# Altium PCB 110-00315-D_B1-DevKit.PcbDoc (part 9 of 9)
Units mil, origin at the board's own origin, x right, y up, seen from the top; angles counter-clockwise.
Board outline 5199.57 x 2702 mil, 8 copper layers (Top Layer, Layer 2-GND-Plane, Layer 3, Layer 4, Layer 5, Layer 6, Layer 7-PWR-Plane, Bottom Layer), stack 60.866 mil thick; 418 components, 298 nets, 1591 pads, 1631 vias.
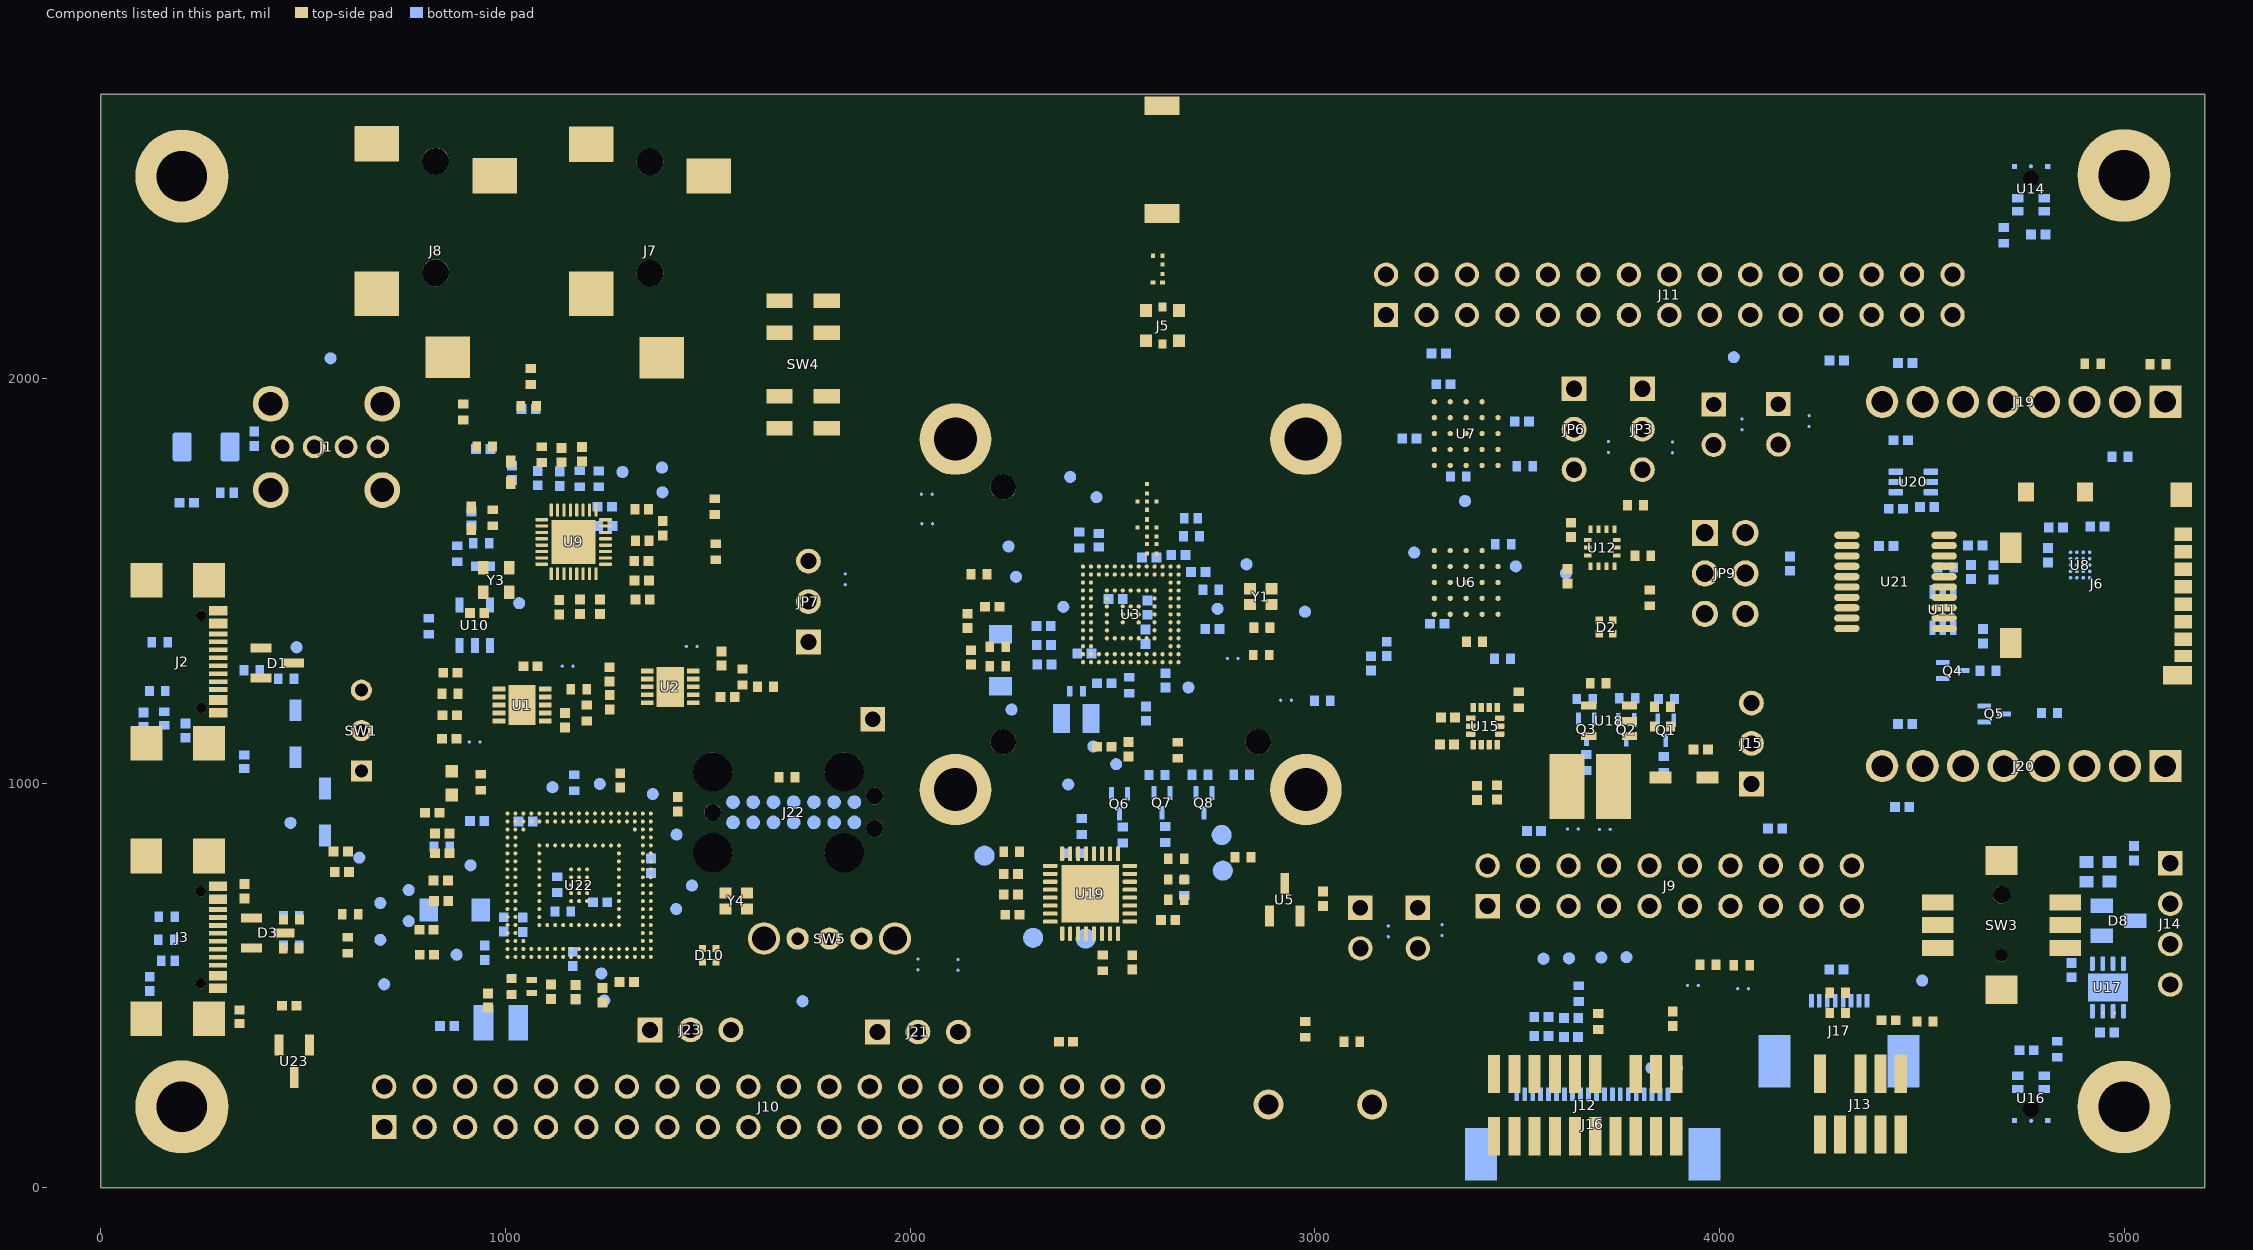
[diagram p14: the components of this part, seen from the top]

## Polygon pours and split planes (outlines as drawn)
GND on Top Layer "GND" (solid, remove dead copper, pour order 15): 19.98,2682.1 1559.5,2682.1 1559.5,2571.6 1559.5,2311.1 4635.5,2311.1 4635.5,2682.1 5199.58,2682.1 5199.58,0 20.99,0
GND on Top Layer "gnd" (solid, remove dead copper, pour order 0): 2640.58,2308.7 2640.58,1589.8 2605.58,1589.8 2605.58,2308.7 2377.58,2308.7 2377.58,1522.8 2817.58,1522.8 2817.58,2308.7
AG on Top Layer "AG" (solid, remove dead copper, pour order 22): 1457.53,1570.8 1238.53,1570.8 1238.53,1680.8 1004.53,1680.8 1004.53,1510.8 858.53,1510.8 858.53,1390.8 778.53,1390.8 778.53,1938.8 607.53,2109.8 607.53,2681.8 1550.53,2675.8 1550.53,1830.8 1457.53,1830.8 1457.53,1820.8
GND on Layer 3 "GND" (solid, remove dead copper, pour order 21): 19.53,2681.8 1558.53,2681.8 1557.53,2680.8 1557.53,2309.8 4635.53,2309.8 4635.53,2681.8 4636.53,2682.8 5179.53,2682.8 5179.53,19.8 20.53,19.8
AG on Layer 3 "AG" (solid, remove dead copper, pour order 10): 1457.53,1570.8 1238.53,1570.8 1238.53,1680.8 1004.53,1680.8 1004.53,1510.8 858.53,1510.8 858.53,1390.8 778.53,1390.8 778.53,1938.8 607.53,2109.8 607.53,2681.8 1550.53,2675.8 1550.53,1830.8 1457.53,1830.8 1457.53,1820.8
GND on Layer 4 "GND" (solid, remove dead copper, pour order 20): 19.53,2681.8 1558.53,2681.8 1557.53,2680.8 1557.53,2309.8 4635.53,2309.8 4635.53,2681.8 4636.53,2682.8 5179.53,2682.8 5179.53,19.8 20.53,19.8
AG on Layer 4 "AG" (solid, remove dead copper, pour order 23): 1457.53,1570.8 1238.53,1570.8 1238.53,1680.8 1004.53,1680.8 1004.53,1510.8 858.53,1510.8 858.53,1390.8 778.53,1390.8 778.53,1938.8 607.53,2109.8 607.53,2681.8 1550.53,2675.8 1550.53,1830.8 1457.53,1830.8 1457.53,1820.8
GND on Layer 6 "GND" (solid, remove dead copper, pour order 18): 19.53,2681.8 1558.53,2681.8 1557.53,2680.8 1557.53,2309.8 4635.53,2309.8 4635.53,2681.8 4636.53,2682.8 5179.53,2682.8 5179.53,19.8 20.53,19.8
AG on Layer 6 "AG" (solid, remove dead copper, pour order 25): 1457.53,1570.8 1238.53,1570.8 1238.53,1680.8 1004.53,1680.8 1004.53,1510.8 858.53,1510.8 858.53,1390.8 778.53,1390.8 778.53,1938.8 607.53,2109.8 607.53,2681.8 1550.53,2675.8 1550.53,1830.8 1457.53,1830.8 1457.53,1820.8
GND on Layer 5 "GND" (solid, remove dead copper, pour order 19): 19.53,2681.8 1558.53,2681.8 1557.53,2680.8 1557.53,2309.8 4635.53,2309.8 4635.53,2681.8 4636.53,2682.8 5179.53,2682.8 5179.53,19.8 20.53,19.8
AG on Layer 5 "AG" (solid, remove dead copper, pour order 24): 1457.53,1570.8 1238.53,1570.8 1238.53,1680.8 1004.53,1680.8 1004.53,1510.8 858.53,1510.8 858.53,1390.8 778.53,1390.8 778.53,1938.8 607.53,2109.8 607.53,2681.8 1550.53,2675.8 1550.53,1830.8 1457.53,1830.8 1457.53,1820.8
GND on Bottom Layer "GND" (solid, remove dead copper, pour order 16): 19.53,2681.8 1558.53,2681.8 1557.53,2680.8 1557.53,2309.8 4635.53,2309.8 4635.53,2681.8 4636.53,2682.8 5179.53,2682.8 5179.53,19.8 20.53,19.8
AG on Bottom Layer "AG" (solid, remove dead copper, pour order 26): 1457.53,1570.8 1238.53,1570.8 1238.53,1680.8 1004.53,1680.8 1004.53,1510.8 858.53,1510.8 858.53,1390.8 778.53,1390.8 778.53,1938.8 607.53,2109.8 607.53,2681.8 1550.53,2675.8 1550.53,1830.8 1457.53,1830.8 1457.53,1820.8
V_3V3 on Layer 7-PWR-Plane (split plane): 5179.48,2080.7 5179.48,380.89 4474.68,380.89 4474.68,503.8 4474.29,505.75 4473.18,507.4 4471.53,508.51 4469.58,508.89 4371,508.89 4369.05,508.51 4367.4,507.4 4366.29,505.75 4365.91,503.8 4365.91,320.89 3659.68,320.89 3659.68,505.8 3659.29,507.75 3658.18,509.4 3656.53,510.51 3654.58,510.89 3577.72,510.89 3575.77,510.51 3574.12,509.4 3573.01,507.75 3572.62,505.8 3572.62,315.89 698.68,315.89 698.68,1125.7 1088.58,1125.7 1090.53,1126.09 1092.18,1127.19 1093.29,1128.85 1093.68,1130.8 1093.68,1330.8 1093.68,1360.7 1303.48,1360.7 1303.48,1010.89 878.8,1010.89 876.85,1010.51 875.19,1009.4 844.97,979.18 843.87,977.53 843.48,975.58 843.48,475.8 843.87,473.85 844.97,472.19 846.63,471.09 848.58,470.7 1048.58,470.7 1050.53,471.09 1052.18,472.19 1095.69,515.7 1288.53,515.7 1290.48,516.09 1292.14,517.19 1293.24,518.85 1293.63,520.8 1293.63,552.7 1323.58,552.7 1325.53,553.09 1327.18,554.19 1328.29,555.85 1328.68,557.8 1328.68,750.7 1374.48,750.7 1374.48,529.8 1374.87,527.85 1375.97,526.19 1377.63,525.09 1379.58,524.7 4854.58,524.7 4856.53,525.09 4858.18,526.19 4859.29,527.85 4859.68,529.8 4859.68,1125.8 4859.68,1650.7 4988.58,1650.7 4990.53,1651.09 4992.18,1652.19 4993.29,1653.85 4993.68,1655.8 4993.68,1845.8 4993.29,1847.75 4992.18,1849.4 4990.53,1850.51 4988.58,1850.89 4311.64,1850.89 4263.14,1899.4 4261.48,1900.51 4259.53,1900.89 4021.69,1900.89 3989.18,1933.4 3987.53,1934.51 3985.58,1934.89 2433.68,1934.89 2433.68,2080.7
V_1V8_R on Layer 7-PWR-Plane (split plane): 276 vertices, not listed, extent 20.1,20.1 5179.48,2681.91
V_1V8_C on Layer 7-PWR-Plane (split plane): 1228.48,1510.89 1083.58,1510.89 1081.63,1510.51 1079.97,1509.4 1078.87,1507.75 1078.48,1505.8 1078.48,1430.89 958.68,1430.89 958.68,1817.7 1228.48,1817.7
VDD_CORE_0V8_J on Layer 7-PWR-Plane (split plane): 1408.48,864.89 1252.53,864.89 1250.58,864.51 1248.93,863.4 1247.82,861.75 1247.43,859.8 1247.43,742.89 1178.68,742.89 1178.68,943.8 1178.29,945.75 1177.18,947.4 1175.53,948.51 1173.58,948.89 986.53,948.89 984.58,948.51 982.93,947.4 981.82,945.75 981.43,943.8 981.43,875.8 981.82,873.85 982.93,872.19 984.58,871.09 986.53,870.7 1088.45,870.7 1089.43,604.78 1089.63,603.81 1089.82,602.85 1089.83,602.84 1089.83,602.83 1090.38,602.02 1090.93,601.19 1090.94,601.19 1090.94,601.18 1091.75,600.64 1092.58,600.09 1092.59,600.09 1092.6,600.08 1093.55,599.89 1094.53,599.7 1282.43,599.7 1282.43,558.8 1282.53,558.3 1282.43,557.8 1282.82,555.85 1283.43,554.93 1283.43,525.89 1093.53,525.89 1091.58,525.51 1089.93,524.4 1089.83,524.26 1046.47,480.89 853.68,480.89 853.68,973.47 880.91,1000.7 1408.48,1000.7
VDD_CORE_0V8 on Layer 7-PWR-Plane (split plane): 2765.48,1561.1 2724.58,1561.1 2722.63,1560.71 2720.97,1559.6 2719.87,1557.95 2719.48,1556 2719.48,1349.89 2599.58,1349.89 2597.63,1349.51 2595.97,1348.4 2594.87,1346.75 2594.48,1344.8 2594.48,1111.89 2284.68,1111.89 2284.68,1241.7 2352.58,1241.7 2354.53,1242.09 2356.18,1243.19 2357.29,1244.85 2357.68,1246.8 2357.68,1660.7 2765.48,1660.7
VIN_RAW on Layer 7-PWR-Plane (split plane): 4014.48,1378.8 4014.87,1376.85 4015.97,1375.19 4017.63,1374.09 4019.58,1373.7 4224.48,1373.7 4224.48,1203.8 4224.87,1201.85 4225.97,1200.19 4227.63,1199.09 4229.58,1198.7 4544.48,1198.7 4544.48,933.89 4069.58,933.89 4067.63,933.51 4065.97,932.4 4064.87,930.75 4064.48,928.8 4064.48,853.89 3374.58,853.89 3372.63,853.51 3370.97,852.4 3369.87,850.75 3369.48,848.8 3369.48,648.89 2344.68,648.89 2344.68,673.8 2344.29,675.75 2343.18,677.4 2341.53,678.51 2339.58,678.89 2084.58,678.89 2082.63,678.51 2080.97,677.4 2079.87,675.75 2079.48,673.8 2079.48,628.89 1479.68,628.89 1479.68,1240.7 1644.48,1240.7 1644.48,918.8 1644.87,916.85 1645.97,915.19 1647.63,914.09 1649.58,913.7 1689.58,913.7 1691.53,914.09 1693.18,915.19 1694.29,916.85 1694.68,918.8 1694.68,963.7 1989.48,963.7 1989.48,918.8 1989.87,916.85 1990.97,915.19 1992.63,914.09 1994.58,913.7 2024.48,913.7 2024.48,838.8 2024.87,836.85 2025.97,835.19 2027.63,834.09 2029.58,833.7 3084.58,833.7 3086.53,834.09 3088.18,835.19 3089.29,836.85 3089.68,838.8 3089.68,943.7 3354.58,943.7 3356.53,944.09 3358.18,945.19 3359.29,946.85 3359.68,948.8 3359.68,1043.7 3584.58,1043.7 3586.53,1044.09 3588.18,1045.19 3589.29,1046.85 3589.68,1048.8 3589.68,1468.7 4014.48,1468.7
no net on Layer 7-PWR-Plane (split plane): 4627.43,2681.3 4408.32,2681.91 4627.43,2681.91
V_CON_IO on Layer 7-PWR-Plane (split plane): 4983.48,1660.89 4854.58,1660.89 4852.63,1660.51 4850.97,1659.4 4849.87,1657.75 4849.48,1655.8 4849.48,1130.89 4674.68,1130.89 4674.68,1378.8 4674.68,1638.8 4674.29,1640.75 4673.18,1642.4 4671.53,1643.51 4669.58,1643.89 4229.58,1643.89 4227.63,1643.51 4225.97,1642.4 4224.87,1640.75 4224.48,1638.8 4224.48,1383.89 4024.68,1383.89 4024.68,1694.7 4305.53,1694.7 4307.48,1695.09 4309.14,1696.19 4310.24,1697.85 4310.63,1699.8 4310.63,1840.7 4983.48,1840.7
GND on Layer 2-GND-Plane (split plane): 5179.48,20.1 20.1,20.1 20.1,2681.91 597.43,2681.91 597.43,2107.8 597.82,2105.85 598.93,2104.19 768.43,1934.69 768.43,1523.58 768.48,1523.35 768.48,1385.8 768.87,1383.85 769.97,1382.19 771.63,1381.09 773.58,1380.7 863.58,1380.7 865.53,1381.09 867.18,1382.19 868.29,1383.85 868.68,1385.8 868.68,1500.7 1009.48,1500.7 1011.44,1501.09 1013.09,1502.19 1014.19,1503.85 1014.58,1505.8 1014.58,1670.7 1228.48,1670.7 1228.48,1565.8 1228.87,1563.85 1229.97,1562.19 1231.63,1561.09 1233.58,1560.7 1462.53,1560.7 1464.48,1561.09 1466.14,1562.19 1467.24,1563.85 1467.63,1565.8 1467.63,1820.7 1555.53,1820.7 1557.48,1821.09 1559.14,1822.19 1560.24,1823.85 1560.63,1825.8 1560.63,2131.8 1560.63,2311.03 1561.55,2310.84 1562.52,2310.65 1562.53,2310.65 1562.54,2310.65 4630.48,2310.65 4632.43,2311.03 4634.08,2312.14 4634.2,2312.25 4635.3,2313.91 4635.69,2315.86 4635.69,2680.79 4635.69,2680.81 4635.69,2680.82 4635.49,2681.78 4635.47,2681.91 5179.48,2681.91
AG on Layer 2-GND-Plane (split plane): 769.97,2677.19 771.63,2676.09 773.58,2675.7 1550.43,2675.7 1550.43,2633.8 1550.43,2131.8 1550.43,1830.89 1462.53,1830.89 1460.58,1830.51 1458.93,1829.4 1457.82,1827.75 1457.43,1825.8 1457.43,1570.89 1238.68,1570.89 1238.68,1675.8 1238.29,1677.75 1237.18,1679.4 1235.53,1680.51 1233.58,1680.89 1009.48,1680.89 1007.53,1680.51 1005.88,1679.4 1004.77,1677.75 1004.39,1675.8 1004.39,1510.89 863.58,1510.89 861.63,1510.51 859.97,1509.4 858.87,1507.75 858.48,1505.8 858.48,1390.89 778.68,1390.89 778.68,1523.54 778.63,1523.77 778.63,1936.51 778.68,1936.75 778.29,1938.7 777.18,1940.35 607.63,2109.91 607.63,2681.91 765.26,2681.91

## Keep-outs
Keep-Out Layer:
  circle w10: c1512,1028 r55.26
  circle w10: c1512,928 r21.41
  circle w10: c1512,828 r48.67
  circle w10: c1837,828 r48.67
  circle w10: c1912,888.04 r21.41
  circle w10: c1912,967.96 r21.41
  circle w10: c1837,1028 r48.67
  circle w2: c1357,2260.1 r46.92
  circle w2: c1357,2535.7 r47.58
  circle w2: c827,2536.7 r48.59
  circle w2: c827,2261.1 r50.6
  pour cut-out: 285.4,1959.41 284.73,1903.22 285.4,1902.55 285.4,1895 339.34,1895 340.92,1959.41
  pour cut-out: 4659.58,608.8 4659.58,538.8 4729.58,538.8 4729.58,608.8
  pour cut-out: 4659.58,758.8 4659.58,688.8 4729.58,688.8 4729.58,758.8
  pour cut-out: 2809.02,1149.81 2909.02,1149.81 2909.02,1059.81 2809.02,1059.81
  pour cut-out: 2179.65,1148.55 2279.65,1148.55 2279.65,1058.55 2179.65,1058.55
  pour cut-out: 2179.58,1778.8 2279.58,1778.8 2279.58,1688.8 2179.58,1688.8
  lines w1: 0,0 0,2702 5199.58,2702 5199.58,0 0,0

## Other copper
Top Layer:
  pour cut-out: 2575.53,1529.8 2625.53,1529.8 2625.53,1509.8 2575.53,1509.8
  region net VIN_RAW: 1302.53,1186.8 1302.53,1086.8 1352.53,1086.8 1352.53,1186.8
  region net VIN_RAW: 998.58,1205.8 953.58,1205.8 953.58,1175.8 998.58,1175.8 998.58,1066.8 868.58,1066.8 868.58,1290.8 873.58,1295.8 998.58,1295.8
  region net VIN_RAW: 1363.58,1250.8 1318.58,1250.8 1318.58,1220.8 1363.58,1220.8 1363.58,1180.8 1283.58,1180.8 1283.58,1205.8 1243.58,1205.8 1243.58,1265.8 1283.58,1265.8 1283.58,1290.8 1363.58,1290.8
  region net VIN_RAW: 868.58,1066.8 870.58,1068.8 1352.53,1068.8 1352.53,1108.8 1349.58,1108.8 869.58,1108.8
  region net VIN_RAW: 1337.53,1133.8 1479.58,1133.8 1644.58,1133.8 1644.58,1183.8 1479.58,1183.8 1337.53,1183.8
  region net VIN_RAW: 3704.58,1128.8 3704.58,1103.8 3646.58,1103.8 3643.53,983.8 3371.03,983.8 3371.03,1036.4 3587.53,1036.4 3587.53,1128.8
  pour cut-out: 597.53,2698.8 607.53,2698.8 607.53,2109.8 778.53,1938.8 778.53,1390.8 859.53,1390.8 859.53,1510.8 1004.53,1510.8 1004.53,1680.8 1238.53,1680.8 1238.53,1570.8 1457.53,1570.8 1457.53,1830.8 1550.53,1830.8 1550.53,2685.8 1560.53,2685.8 1560.53,1820.8 1467.53,1820.8 1467.53,1560.8 1228.53,1560.8 1228.53,1670.8 1014.53,1670.8 1014.53,1500.8 868.53,1500.8 868.53,1380.8 768.53,1380.8 768.53,1934.8 597.53,2105.8
  pour cut-out: 218.5,536.89 278.5,536.89 278.5,471.89 218.5,471.89
  pour cut-out: 216.5,762.89 276.5,762.89 276.5,697.89 216.5,697.89
  pour cut-out: 216.5,1218.89 276.5,1218.89 276.5,1153.89 216.5,1153.89
  pour cut-out: 219.5,1444.89 279.5,1444.89 279.5,1379.89 219.5,1379.89
  pour cut-out: 4499.7,1465.22 4499.7,1385.22 4599.7,1385.22 4599.7,1465.22
  pour cut-out: 4717.7,2537.22 4717.7,2457.22 4817.7,2457.22 4817.7,2537.22
  pour cut-out: 4717.7,237.22 4717.7,157.22 4817.7,157.22 4817.7,237.22
  region net ANT_IO: 2578.59,2386.8 2624.59,2340.8 2666.57,2386.8
  region net NetC4_2: 1083.58,1205.8 1173.58,1205.8 1173.58,1260.8 1148.58,1260.8 1148.58,1315.8 1083.58,1315.8
Layer 3:
  pour cut-out: 2575.53,1529.8 2650.53,1529.8 2650.53,1509.8 2575.53,1509.8
  pour cut-out: 597.53,2698.8 607.53,2698.8 607.53,2109.8 778.53,1938.8 778.53,1390.8 859.53,1390.8 859.53,1510.8 1004.53,1510.8 1004.53,1680.8 1238.53,1680.8 1238.53,1570.8 1457.53,1570.8 1457.53,1830.8 1550.53,1830.8 1550.53,2685.8 1560.53,2685.8 1560.53,1820.8 1467.53,1820.8 1467.53,1560.8 1228.53,1560.8 1228.53,1670.8 1014.53,1670.8 1014.53,1500.8 868.53,1500.8 868.53,1380.8 768.53,1380.8 768.53,1934.8 597.53,2105.8
  pour cut-out: 218.5,536.89 278.5,536.89 278.5,471.89 218.5,471.89
  pour cut-out: 216.5,762.89 276.5,762.89 276.5,697.89 216.5,697.89
  pour cut-out: 216.5,1218.89 276.5,1218.89 276.5,1153.89 216.5,1153.89
  pour cut-out: 219.5,1444.89 279.5,1444.89 279.5,1379.89 219.5,1379.89
  pour cut-out: 4499.7,1465.22 4499.7,1385.22 4599.7,1385.22 4599.7,1465.22
  pour cut-out: 4717.7,2537.22 4717.7,2457.22 4817.7,2457.22 4817.7,2537.22
  pour cut-out: 4717.7,237.22 4717.7,157.22 4817.7,157.22 4817.7,237.22
Layer 5:
  pour cut-out: 2575.53,1529.8 2625.53,1529.8 2625.53,1509.8 2575.53,1509.8
  pour cut-out: 597.53,2698.8 607.53,2698.8 607.53,2109.8 778.53,1938.8 778.53,1390.8 859.53,1390.8 859.53,1510.8 1004.53,1510.8 1004.53,1680.8 1238.53,1680.8 1238.53,1570.8 1457.53,1570.8 1457.53,1830.8 1550.53,1830.8 1550.53,2685.8 1560.53,2685.8 1560.53,1820.8 1467.53,1820.8 1467.53,1560.8 1228.53,1560.8 1228.53,1670.8 1014.53,1670.8 1014.53,1500.8 868.53,1500.8 868.53,1380.8 768.53,1380.8 768.53,1934.8 597.53,2105.8
  pour cut-out: 218.5,536.89 278.5,536.89 278.5,471.89 218.5,471.89
  pour cut-out: 216.5,762.89 276.5,762.89 276.5,697.89 216.5,697.89
  pour cut-out: 216.5,1218.89 276.5,1218.89 276.5,1153.89 216.5,1153.89
  pour cut-out: 219.5,1444.89 279.5,1444.89 279.5,1379.89 219.5,1379.89
  pour cut-out: 4499.7,1465.22 4499.7,1385.22 4599.7,1385.22 4599.7,1465.22
  pour cut-out: 4717.7,2537.22 4717.7,2457.22 4817.7,2457.22 4817.7,2537.22
  pour cut-out: 4717.7,237.22 4717.7,157.22 4817.7,157.22 4817.7,237.22
Layer 4:
  pour cut-out: 2575.53,1529.8 2650.53,1529.8 2650.53,1509.8 2575.53,1509.8
  pour cut-out: 597.53,2698.8 607.53,2698.8 607.53,2109.8 778.53,1938.8 778.53,1390.8 859.53,1390.8 859.53,1510.8 1004.53,1510.8 1004.53,1680.8 1238.53,1680.8 1238.53,1570.8 1457.53,1570.8 1457.53,1830.8 1550.53,1830.8 1550.53,2685.8 1560.53,2685.8 1560.53,1820.8 1467.53,1820.8 1467.53,1560.8 1228.53,1560.8 1228.53,1670.8 1014.53,1670.8 1014.53,1500.8 868.53,1500.8 868.53,1380.8 768.53,1380.8 768.53,1934.8 597.53,2105.8
  pour cut-out: 218.5,536.89 278.5,536.89 278.5,471.89 218.5,471.89
  pour cut-out: 216.5,762.89 276.5,762.89 276.5,697.89 216.5,697.89
  pour cut-out: 216.5,1218.89 276.5,1218.89 276.5,1153.89 216.5,1153.89
  pour cut-out: 219.5,1444.89 279.5,1444.89 279.5,1379.89 219.5,1379.89
  pour cut-out: 4499.7,1465.22 4499.7,1385.22 4599.7,1385.22 4599.7,1465.22
  pour cut-out: 4717.7,2537.22 4717.7,2457.22 4817.7,2457.22 4817.7,2537.22
  pour cut-out: 4717.7,237.22 4717.7,157.22 4817.7,157.22 4817.7,237.22
Layer 6:
  pour cut-out: 2575.53,1529.8 2650.53,1529.8 2650.53,1509.8 2575.53,1509.8
  pour cut-out: 597.53,2698.8 607.53,2698.8 607.53,2109.8 778.53,1938.8 778.53,1390.8 859.53,1390.8 859.53,1510.8 1004.53,1510.8 1004.53,1680.8 1238.53,1680.8 1238.53,1570.8 1457.53,1570.8 1457.53,1830.8 1550.53,1830.8 1550.53,2685.8 1560.53,2685.8 1560.53,1820.8 1467.53,1820.8 1467.53,1560.8 1228.53,1560.8 1228.53,1670.8 1014.53,1670.8 1014.53,1500.8 868.53,1500.8 868.53,1380.8 768.53,1380.8 768.53,1934.8 597.53,2105.8
  pour cut-out: 218.5,536.89 278.5,536.89 278.5,471.89 218.5,471.89
  pour cut-out: 216.5,762.89 276.5,762.89 276.5,697.89 216.5,697.89
  pour cut-out: 216.5,1218.89 276.5,1218.89 276.5,1153.89 216.5,1153.89
  pour cut-out: 219.5,1444.89 279.5,1444.89 279.5,1379.89 219.5,1379.89
  pour cut-out: 4499.7,1465.22 4499.7,1385.22 4599.7,1385.22 4599.7,1465.22
  pour cut-out: 4717.7,2537.22 4717.7,2457.22 4817.7,2457.22 4817.7,2537.22
  pour cut-out: 4717.7,237.22 4717.7,157.22 4817.7,157.22 4817.7,237.22
Bottom Layer:
  pour cut-out: 2575.53,1529.8 2650.53,1529.8 2650.53,1509.8 2575.53,1509.8
  region net VIN_RAW: 948.58,1350.8 948.58,1295.8 933.58,1295.8 933.58,1260.8 998.58,1260.8 998.58,1350.8
  pour cut-out: 597.53,2698.8 607.53,2698.8 607.53,2109.8 778.53,1938.8 778.53,1390.8 859.53,1390.8 859.53,1510.8 1004.53,1510.8 1004.53,1680.8 1238.53,1680.8 1238.53,1570.8 1457.53,1570.8 1457.53,1830.8 1550.53,1830.8 1550.53,2685.8 1560.53,2685.8 1560.53,1820.8 1467.53,1820.8 1467.53,1560.8 1228.53,1560.8 1228.53,1670.8 1014.53,1670.8 1014.53,1500.8 868.53,1500.8 868.53,1380.8 768.53,1380.8 768.53,1934.8 597.53,2105.8
  pour cut-out: 218.5,536.89 278.5,536.89 278.5,471.89 218.5,471.89
  pour cut-out: 216.5,762.89 276.5,762.89 276.5,697.89 216.5,697.89
  pour cut-out: 216.5,1218.89 276.5,1218.89 276.5,1153.89 216.5,1153.89
  pour cut-out: 219.5,1444.89 279.5,1444.89 279.5,1379.89 219.5,1379.89
  pour cut-out: 4499.7,1465.22 4499.7,1385.22 4599.7,1385.22 4599.7,1465.22
  pour cut-out: 4717.7,2537.22 4717.7,2457.22 4817.7,2457.22 4817.7,2537.22
  pour cut-out: 4717.7,237.22 4717.7,157.22 4817.7,157.22 4817.7,237.22
  pour cut-out: 1444.53,1106.8 1444.53,766.8 1454.53,756.8 1984.53,756.8 1984.53,1046.8 1924.53,1106.8
  region net V_3V3: 1232.53,1262.8 1232.53,1362.8 1162.53,1362.8 1162.53,1262.8
  region net VDD_CORE_0V8_J: 1018.58,492.8 928.58,492.8 928.58,505.8 903.58,505.8 858.58,505.8 858.58,550.8 933.53,550.8 933.53,574.8 961.53,574.8 961.53,541.8 1018.58,541.8
  region net V_1V8_R: 1443.58,1305.8 1443.58,1395.8 1353.58,1395.8 1353.58,1305.8
  text "'.PCB_DWG_NO'" at 5156.53,2124.8 h50
  text "R" at 5127.04,35.55 h60
  text "D" at 5126.77,35.42 h60
Layer 2-GND-Plane (plane layer: these items are gaps in the copper):
  region: 1565.53,2688.8 1565.53,2318.8 4631.56,2318.8 4631.56,2688.8
  lines w10: 1563.53,2690.8 1562.54,2315.74 4630.48,2315.74 4630.59,2315.86 4630.59,2680.79 4625.53,2685.8 ; 602.53,2107.8 773.58,1936.75 773.53,1936.7 773.53,1523.58 773.58,1523.54 773.58,1385.8 863.58,1385.8 863.58,1505.8 1009.48,1505.8 1009.48,1675.8 1233.58,1675.8 1233.58,1565.8 1462.53,1565.8 1462.53,1825.8 1555.53,1825.8 1555.53,2131.8 1555.53,2633.8 1555.53,2680.8 773.58,2680.8 760.58,2693.8 602.53,2693.8 602.53,2107.8
Layer 7-PWR-Plane (plane layer: these items are gaps in the copper):
  region: 3005.58,2685.8 4627.53,2681.3 4627.53,2308.3 2205.53,2305.3 1559.53,2305.3 1559.53,2685.8
  lines w10: 1093.53,520.8 1288.53,520.8 1288.53,557.8 ; 1093.58,520.8 1048.58,475.8 848.58,475.8 848.58,975.58 878.8,1005.8 1393.58,1005.8 1413.58,1005.8 1413.58,859.8 1252.53,859.8 1252.53,737.8 1173.58,737.8 1173.58,943.8 1093.58,943.8 ; 1100.53,943.8 986.53,943.8 986.53,875.8 1093.53,875.8 1094.53,604.8 ; 1102.98,604.8 1094.53,604.8 ; 1218.58,1005.8 1308.58,1005.8 1308.58,1365.8 1088.58,1365.8 1088.58,1330.8 1088.58,1130.8 693.58,1130.8 693.58,310.8 2898.58,310.8 3577.72,310.8 3577.72,505.8 3654.58,505.8 3654.58,315.8 4371,315.8 4371,503.8 4469.58,503.8 4469.58,375.8 5199.58,375.8 ; 1286.53,604.8 1094.53,604.8 ; 1287.53,557.8 1323.58,557.8 1323.58,755.8 1379.58,755.8 1379.58,529.8 4854.58,529.8 4854.58,1125.8 ; 1287.53,558.8 1287.53,604.8 ; 1558.53,2686.8 1558.53,2308.8 4632.53,2310.8 4632.53,2688.8 ; 4014.58,1473.8 3584.58,1473.8 3584.58,1048.8 3354.58,1048.8 3354.58,948.8 3084.58,948.8 3084.58,838.8 2029.58,838.8 2029.58,918.8 1994.58,918.8 1994.58,968.8 1689.58,968.8 1689.58,918.8 1649.58,918.8 1649.58,1245.8 1474.58,1245.8 1474.58,623.8 2084.58,623.8 2084.58,673.8 2339.58,673.8 2339.58,643.8 2549.58,643.8 3374.58,643.8 3374.58,848.8 4069.58,848.8 4069.58,928.8 4549.58,928.8 4549.58,1203.8 4229.58,1203.8 4229.58,1378.8 ; 4305.53,1844.8 4305.53,1699.8 4019.58,1699.8 4019.58,1378.8 4229.58,1378.8 ; 4666.58,1125.8 4854.58,1125.8 ; 5202.58,2085.8 2428.58,2085.8 2428.58,1929.8 3985.58,1929.8 4019.58,1895.8 4259.53,1895.8 4309.53,1845.8 4988.58,1845.8 4988.58,1655.8 4854.58,1655.8 4854.58,1125.8 ; 4229.58,1378.8 4229.58,1638.8 4669.58,1638.8 4669.58,1378.8 4669.58,1125.8 4854.58,1125.8 ; 953.58,1425.8 1083.58,1425.8 1083.58,1505.8 1233.58,1505.8 1233.58,1822.8 953.58,1822.8 953.58,1425.8 ; 2279.58,1106.8 2279.58,1246.8 2352.58,1246.8 2352.58,1665.8 2770.58,1665.8 2770.58,1556 2724.58,1556 2724.58,1344.8 2599.58,1344.8 2599.58,1106.8 2279.58,1106.8

## Silkscreen, mask and mechanical layers (free items; w line width, h text height)
Top Overlay:
  drawing of 31 lines, arcs and shapes, not listed
  text "'.ASSY_DWG_NO'" at 4001.53,2512.8 h35
  text "ALIF" at 3389.58,2509.8 h250
  text ".Marketing Name" at 4115.53,2449.8 h35
  text "SEMICONDUCTOR" at 3397.58,2441.8 h95
  text "www.alifsemi.com" at 3198.58,2375.8 h50
  text "LINE_IN" at 568.53,2338.8 h35 r270
  text "30" at 4592,2333 h30
  text "LINE_OUT" at 1100.53,2331.8 h35 r270
  text "10" at 3590,2332 h30
  text "20" at 4091,2331 h30
  text "SE    U2    LP" at 1864.58,2288.8 h35 r270
  text "5" at 3396,2055 h30
  text "15" at 3891,2055 h30
  text "25" at 4389,2055 h30
  text "3V3  1V8" at 3705.53,2013.8 h35 r270
  text "SOC_PWR" at 3874.53,2003.8 h35 r270
  text "HOST USB" at 72.53,1990.8 h35
  text "FLEX" at 3542.53,1951.8 h35 r270
  text "1V8" at 4112.53,1720.8 h35
  text "USB_V" at 3907.53,1717.8 h35
  text "18 33 5" at 3866,1637 h35 r270
  text "VREG_DIG" at 1639.53,1578.8 h35 r270
  text "1V8  3V3" at 1815.53,1578.8 h35 r270
  text "DEV_USB" at 79.53,1569.8 h35
  text "PWR ON" at 504.53,1241.8 h35 r270
  text "K     A" at 4151,1219 h35 r270
  text "PRG USB" at 66.53,882.8 h35
  text "10" at 3838,869 h30
  text "20" at 4339,868 h30
  text "CAN" at 4934.53,858.8 h35
  text "G CH CL G" at 4984.53,802.8 h35 r270
  text "DIS-EN" at 1696.53,717.8 h35
  text "5" at 3642,591 h30
  text "15" at 4140,591 h30
  text "BUCK" at 3091.53,523.8 h35 r270
  text "MAIN" at 3231.53,517.8 h35 r270
  text "G  T  R" at 1904,455 h35
  text "G  T  R" at 1338,453 h35
  text "JSEU" at 1625.53,445.8 h35
  text "SEU" at 2196,418 h35
  text "40" at 2615.58,329.8 h30
  text "10" at 1045.53,319.8 h30
  text "20" at 1624.53,316.8 h30
  text "RESET" at 2932.53,74.8 h35
  text "5" at 914,46 h30
  text "15" at 1412,46 h30
  text "25" at 1910,46 h30
  text "35" at 2412,46 h30
Bottom Overlay:
  drawing of 44 lines, arcs and shapes, not listed
  text "nc" at 4290.53,2310.1 h30
  text "nc" at 3790.53,2305.1 h30
  text "nc" at 4185.53,2305.1 h30
  text "P15_1" at 4610.53,2305.12 h30
  text "P1_0" at 3205.53,2300.12 h30
  text "P1_1" at 3300.53,2300.12 h30
  text "1V8" at 3395.53,2300.13 h30
  text "P0_7" at 3500.53,2300.12 h30
  text "P4_6" at 3605.53,2300.12 h30
  text "P4_7" at 3695.53,2300.12 h30
  text "P8_0" at 4005.53,2300.12 h30
  text "P8_1" at 4100.53,2300.12 h30
  text "1V8" at 4395.53,2300.13 h30
  text "P15_0" at 4515.53,2300.12 h30
  text "1V8" at 3900.53,2295.13 h30
  text "nc" at 4480.53,2105.1 h30
  text "nc" at 4585.53,2105.1 h30
  text "P1_2" at 3305.53,2100.12 h30
  text "P1_3" at 3400.53,2100.12 h30
  text "POR" at 3495.53,2100.13 h30
  text "P2_2" at 3600.53,2100.12 h30
  text "GND" at 3705.53,2100.13 h30
  text "nc" at 3790.53,2100.1 h30
  text "P4_4" at 4005.53,2100.12 h30
  text "P4_5" at 4100.53,2100.12 h30
  text "P8_2" at 4300.53,2100.12 h30
  text "P8_3" at 4400.53,2100.12 h30
  text "GND" at 3205.53,2095.13 h30
  text "P4_3" at 3900.53,2095.12 h30
  text "GND" at 4200.53,2095.13 h30
  text "GND" at 4430.53,1875.13 h30
  text "CS" at 4918.43,1870.63 h30
  text "3V3" at 4520.53,1870.13 h30
  text "ANA" at 5128.33,1869.7 h30
  text "MOSI" at 4630.63,1869.43 h30
  text "MISO" at 4731.03,1869.43 h30
  text "RST" at 5026.73,1869.43 h30
  text "SCK" at 4829.63,1868.23 h30
  text "5V" at 4512.53,972.13 h30
  text "GND" at 4425.53,971.13 h30
  text "TXD" at 4923.53,970.8 h30
  text "INT" at 5018.53,970.8 h30
  text "PWM" at 5129.33,970.7 h30
  text "SDA" at 4623.53,970.13 h30
  text "RXD" at 4823.53,969.8 h30
  text "SCL" at 4720.53,969.13 h30
  text "1V8" at 3615.53,845.13 h30
  text "P2_0" at 3955.53,840.12 h30
  text "P0_0" at 3450.53,835.12 h30
  text "P0_1" at 3550.53,835.12 h30
  text "P0_6" at 3755.53,835.12 h30
  text "nc" at 3840.53,835.1 h30
  text "P2_1" at 4050.53,835.12 h30
  text "1V8" at 4150.53,835.13 h30
  text "P2_6" at 4255.53,835.12 h30
  text "P2_7" at 4350.53,835.12 h30
  text "P0_3" at 3665.53,645.12 h30
  text "P0_4" at 3765.53,645.12 h30
  text "P0_5" at 3855.53,645.12 h30
  text "P0_2" at 3565.53,640.12 h30
  text "GND" at 3955.53,640.13 h30
  text "GND" at 4055.53,640.13 h30
  text "P2_3" at 4150.53,640.12 h30
  text "P2_4" at 4255.53,640.12 h30
  text "P2_5" at 4355.53,640.12 h30
  text "GND" at 3455.53,635.13 h30
  text "P5_6" at 1025.53,305.12 h30
  text "P1_7" at 2626.53,302.12 h30
  text "P5_0" at 720.53,300.12 h30
  text "P5_1" at 815.53,300.12 h30
  text "1V8" at 920.53,300.13 h30
  text "P5_7" at 1120.53,300.12 h30
  text "P6_0" at 1225.53,300.12 h30
  text "P6_1" at 1325.53,300.12 h30
  text "1V8" at 1420.53,300.13 h30
  text "P6_6" at 1520.53,300.12 h30
  text "P6_7" at 1625.53,300.12 h30
  text "P7_0" at 1720.53,300.12 h30
  text "P7_1" at 1830.53,300.12 h30
  text "P1_4" at 2225.53,300.12 h30
  text "P1_6" at 2522.53,300.12 h30
  text "P1_5" at 2324.53,298.12 h30
  text "FLEX" at 2427.53,297.8 h30
  text "1V8" at 1915.53,295.13 h30
  text "P7_6" at 2025.53,295.12 h30
  text "P7_7" at 2120.53,295.12 h30
  text "P5_2" at 825.53,85.12 h30
  text "P5_3" at 930.53,85.12 h30
  text "P5_4" at 1030.53,85.12 h30
  text "P5_5" at 1130.53,85.12 h30
  text "GND" at 1225.53,85.13 h30
  text "P6_2" at 1325.53,85.12 h30
  text "P6_3" at 1425.53,85.12 h30
  text "P6_4" at 1530.53,85.12 h30
  text "P6_5" at 1625.53,85.12 h30
  text "GND" at 1730.53,85.13 h30
  text "P7_2" at 1830.53,85.12 h30
  text "P7_3" at 1925.53,85.12 h30
  text "P7_4" at 2025.53,85.12 h30
  text "P8_4" at 2325.53,85.12 h30
  text "P8_5" at 2423.53,84.12 h30
  text "P8_7" at 2629.53,84.12 h30
  text "P8_6" at 2518.53,83.12 h30
  text "GND" at 730.53,80.13 h30
  text "P7_5" at 2125.53,80.12 h30
  text "GND" at 2225.53,80.13 h30
Bottom Solder:
  text "'.PCB_DWG_NO'" at 5156.53,2124.8 h50
  text "D" at 5126.17,36.01 h60
  text "R" at 5126.44,36.14 h60
Top Assembly:
  lines w2: 2561.6,1631.8 2585,1631.8 ; 2561.8,1696 2585.2,1696
Top Courtyard:
  lines w0.5: -938.5,-998.8 -937.62,-998.8 ; -938.5,-998.8 -937.62,-998.8 ; -938.5,-998.8 -937.62,-998.8
Mechanical 5:
  lines w6: 2999,255.24 2999,594.24 3726,594.24 ; 3185.97,257 3187,561 3796,561
Drill Drawing:
  drawing of 690 lines, arcs and shapes, not listed
  text "90 OHM DIIF PAIRS:" at 5269.3,7475.07 h125
  text "100 OHM DIIF PAIRS:" at 1485.26,7463.2 h125
  text "LAYER 1 TRACE WIDTH/SPACE: 6MIL/3MIL" at 5226.56,7159.14 h125
  text "LAYER 8 TRACE WIDTH/SPACE: 5MIL/3MIL" at 232.06,7120.76 h125
  text "LAYER 3 TRACE WIDTH/SPACE: 3.5MIL/3MIL" at 5221.68,6892.08 h125
  text "LAYER 3 TRACE WIDTH/SPACE: 3MIL/4MIL" at 227.18,6853.69 h125
  text "Layer" at 7919.99,6613.8 h60
  text "Name" at 8329.9,6613.8 h60
  text "Material" at 9459.58,6613.8 h60
  text "Thickness" at 10019.44,6613.8 h60
  text "Constant" at 10669.28,6613.8 h60
  text "Board Layer Stack" at 11239.14,6613.8 h60
  text "Top Overlay" at 8329.9,6493.8 h60
  text "Top Solder" at 8329.9,6373.8 h60
  text "SM-003" at 9459.58,6373.8 h60
  text "1.00mil" at 10019.44,6373.8 h60
  text "4" at 10669.28,6373.8 h60
  text "1" at 7919.99,6253.8 h60
  text "Top Layer" at 8329.9,6253.8 h60
  text "CF-004" at 9459.58,6253.8 h60
  text "1.38mil" at 10019.44,6253.8 h60
  text "50 OHM RF:" at 1389.02,6212.93 h125
  text "Dielectric 1" at 8329.9,6133.8 h60
  text "PP-006" at 9459.58,6133.8 h60
  text "6.00mil" at 10019.44,6133.8 h60
  text "4.2" at 10669.28,6133.8 h60
  text "2" at 7919.99,6013.8 h60
  text "Layer 2-GND-Plane" at 8329.9,6013.8 h60
  text "CF-003" at 9459.58,6013.8 h60
  text "0.69mil" at 10019.44,6013.8 h60
  text "Dielectric 2" at 8329.9,5893.8 h60
  text "PP-006" at 9459.58,5893.8 h60
  text "6.00mil" at 10019.44,5893.8 h60
  text "4.2" at 10669.28,5893.8 h60
  text "LAYER 1 TRACE WIDTH: 10 MIL" at 263.53,5872.8 h125
  text "3" at 7919.99,5773.8 h60
  text "Layer 3" at 8329.9,5773.8 h60
  text "CF-003" at 9459.58,5773.8 h60
  text "0.69mil" at 10019.44,5773.8 h60
  text "Dielectric 6" at 8329.9,5653.8 h60
  text "PP-006" at 9459.58,5653.8 h60
  text "6.00mil" at 10019.44,5653.8 h60
  text "4.2" at 10669.28,5653.8 h60
  text "4" at 7919.99,5533.8 h60
  text "Layer 4" at 8329.9,5533.8 h60
  text "CF-004" at 9459.58,5533.8 h60
  text "0.69mil" at 10019.44,5533.8 h60
  text "Dielectric 3" at 8329.9,5413.8 h60
  text "FR-4" at 9459.58,5413.8 h60
  text "18.00mil" at 10019.44,5413.8 h60
  text "4.2" at 10669.28,5413.8 h60
  text "5" at 7919.99,5293.8 h60
  text "Layer 5" at 8329.9,5293.8 h60
  text "CF-003" at 9459.58,5293.8 h60
  text "0.69mil" at 10019.44,5293.8 h60
  text "Dielectric 7" at 8329.9,5173.8 h60
  text "PP-006" at 9459.58,5173.8 h60
  text "6.00mil" at 10019.44,5173.8 h60
  text "4.2" at 10669.28,5173.8 h60
  text "6" at 7919.99,5053.8 h60
  text "Layer 6" at 8329.9,5053.8 h60
  text "CF-004" at 9459.58,5053.8 h60
  text "0.69mil" at 10019.44,5053.8 h60
  text "Dielectric 4" at 8329.9,4933.8 h60
  text "PP-006" at 9459.58,4933.8 h60
  text "6.00mil" at 10019.44,4933.8 h60
  text "4.2" at 10669.28,4933.8 h60
  text "7" at 7919.99,4813.8 h60
  text "Layer 7-PWR-Plane" at 8329.9,4813.8 h60
  text "CF-003" at 9459.58,4813.8 h60
  text "0.69mil" at 10019.44,4813.8 h60
  text "Dielectric 5" at 8329.9,4693.8 h60
  text "PP-006" at 9459.58,4693.8 h60
  text "6.00mil" at 10019.44,4693.8 h60
  text "4.2" at 10669.28,4693.8 h60
  text "8" at 7919.99,4573.8 h60
  text "Bottom Layer" at 8329.9,4573.8 h60
  text "CF-004" at 9459.58,4573.8 h60
  text "1.38mil" at 10019.44,4573.8 h60
  text "Bottom Solder" at 8329.9,4453.8 h60
  text "SM-003" at 9459.58,4453.8 h60
  text "1.00mil" at 10019.44,4453.8 h60
  text "4" at 10669.28,4453.8 h60
  text "Bottom Overlay" at 8329.9,4333.8 h60
  text "Total board thickness:" at 7919.99,4213.8 h60
  text "62.87mil" at 10019.44,4213.8 h60
  text "Symbol" at 6700.59,2793.08 h72
  text "Count" at 6982.49,2793.08 h72
  text "Hole Size" at 7301.14,2793.08 h72
  text "Plated" at 7875.21,2793.08 h72
  text "Via/Pad" at 8122.67,2793.08 h72
  text "Hole Tolerance (+)" at 8417.9,2793.08 h72
  text "Hole Tolerance (-)" at 9020.21,2793.08 h72
  text "1" at 6982.49,2668.9 h60
  text "31.50mil (0.800mm)" at 7301.14,2668.9 h60
  text "NPTH" at 7875.21,2668.9 h60
  text "Pad" at 8122.67,2668.9 h60
  text "1" at 6982.49,2544.72 h60
  text "43.31mil (1.100mm)" at 7301.14,2544.72 h60
  text "NPTH" at 7875.21,2544.72 h60
  text "Pad" at 8122.67,2544.72 h60
  text "2" at 6982.49,2420.54 h60
  text "39.00mil (0.991mm)" at 7301.14,2420.54 h60
  text "NPTH" at 7875.21,2420.54 h60
  text "Pad" at 8122.67,2420.54 h60
  text "2" at 6982.49,2296.35 h60
  text "49.21mil (1.250mm)" at 7301.14,2296.35 h60
  text "PTH" at 7875.21,2296.35 h60
  text "Pad" at 8122.67,2296.35 h60
  text "2" at 6982.49,2172.17 h60
  text "59.00mil (1.499mm)" at 7301.14,2172.17 h60
  text "PTH" at 7875.21,2172.17 h60
  text "Pad" at 8122.67,2172.17 h60
  text "3" at 6982.49,2047.99 h60
  text "31.00mil (0.787mm)" at 7301.14,2047.99 h60
  text "PTH" at 7875.21,2047.99 h60
  text "Pad" at 8122.67,2047.99 h60
  text "M" at 6675.32,2038 h55.19
  text "3" at 6982.49,1923.81 h60
  text "32.00mil (0.813mm)" at 7301.14,1923.81 h60
  text "PTH" at 7875.21,1923.81 h60
  text "Pad" at 8122.67,1923.81 h60
  text "3" at 6982.49,1799.63 h60
  text "42.00mil (1.067mm)" at 7301.14,1799.63 h60
  text "NPTH" at 7875.21,1799.63 h60
  text "Pad" at 8122.67,1799.63 h60
  text "3" at 6982.49,1675.45 h60
  text "63.00mil (1.600mm)" at 7301.14,1675.45 h60
  text "NPTH" at 7875.21,1675.45 h60
  text "Pad" at 8122.67,1675.45 h60
  text "K" at 6675.32,1665.46 h55.19
  text "4" at 6982.49,1551.27 h60
  text "8.00mil (0.203mm)" at 7301.14,1551.27 h60
  text "PTH" at 7875.21,1551.27 h60
  text "Via" at 8122.67,1551.27 h60
  text "F" at 6675.32,1541.28 h55.19
  text "4" at 6982.49,1427.09 h60
  text "25.59mil (0.650mm)" at 7301.14,1427.09 h60
  text "NPTH" at 7875.21,1427.09 h60
  text "Pad" at 8122.67,1427.09 h60
  text "G" at 6675.32,1417.1 h55.19
  text "4" at 6982.49,1302.91 h60
  text "36.22mil (0.920mm)" at 7301.14,1302.91 h60
  text "PTH" at 7875.21,1302.91 h60
  text "Pad" at 8122.67,1302.91 h60
  text "A" at 6675.32,1292.91 h55.19
  text "4" at 6982.49,1178.72 h60
  text "59.06mil (1.500mm)" at 7301.14,1178.72 h60
  text "PTH" at 7875.21,1178.72 h60
  text "Pad" at 8122.67,1178.72 h60
  text "4" at 6982.49,1054.54 h60
  text "67.00mil (1.702mm)" at 7301.14,1054.54 h60
  text "NPTH" at 7875.21,1054.54 h60
  text "Pad" at 8122.67,1054.54 h60
  text "4" at 6982.49,930.36 h60
  text "96.50mil (2.451mm)" at 7301.14,930.36 h60
  text "NPTH" at 7875.21,930.36 h60
  text "Pad" at 8122.67,930.36 h60
  text "4" at 6982.49,806.18 h60
  text "106.00mil (2.692mm)" at 7301.14,806.18 h60
  text "PTH" at 7875.21,806.18 h60
  text "Pad" at 8122.67,806.18 h60
  text "L" at 6675.32,796.19 h55.19
  text "4" at 6982.49,682 h60
  text "125.00mil (3.175mm)" at 7301.14,682 h60
  text "PTH" at 7875.21,682 h60
  text "Pad" at 8122.67,682 h60
  text "E" at 6675.32,672.01 h55.19
  text "5" at 6982.49,557.82 h60
  text "38.00mil (0.965mm)" at 7301.14,557.82 h60
  text "PTH" at 7875.21,557.82 h60
  text "Pad" at 8122.67,557.82 h60
  text "6" at 6982.49,433.64 h60
  text "43.31mil (1.100mm)" at 7301.14,433.64 h60
  text "PTH" at 7875.21,433.64 h60
  text "Pad" at 8122.67,433.64 h60
  text "16" at 6982.49,309.46 h60
  text "53.15mil (1.350mm)" at 7301.14,309.46 h60
  text "PTH" at 7875.21,309.46 h60
  text "Pad" at 8122.67,309.46 h60
  text "18" at 6982.49,185.28 h60
  text "40.16mil (1.020mm)" at 7301.14,185.28 h60
  text "PTH" at 7875.21,185.28 h60
  text "Pad" at 8122.67,185.28 h60
  text "98" at 6982.49,61.09 h60
  text "40.00mil (1.016mm)" at 7301.14,61.09 h60
  text "PTH" at 7875.21,61.09 h60
  text "Pad" at 8122.67,61.09 h60
  text "773" at 6982.49,-63.09 h60
  text "10.00mil (0.254mm)" at 7301.14,-63.09 h60
  text "PTH" at 7875.21,-63.09 h60
  text "Via" at 8122.67,-63.09 h60
  text "D" at 6675.32,-73.08 h55.19
  text "854" at 6982.49,-187.27 h60
  text "6.00mil (0.152mm)" at 7301.14,-187.27 h60
  text "PTH" at 7875.21,-187.27 h60
  text "Via" at 8122.67,-187.27 h60
  text "J" at 6675.32,-197.26 h55.19
  text "1822 Total" at 6982.49,-311.45 h60
Fab Notes:
  lines w0.5: 145.3,10922.98 471.3,10922.98 471.3,11245.98 145.3,11245.98 145.3,10922.98 ; 154.3,12490.7 480.3,12490.7 480.3,12813.7 154.3,12813.7 154.3,12490.7 ; 173.3,13984.19 499.3,13984.19 499.3,14307.19 173.3,14307.19 173.3,13984.19
  text "NOTES: (UNLESS OTHERWISE SPECIFIED)" at 443.99,15424.43 h125
  text "THIS FAB SHOULD BE \"RoHS COMPLIANT\"." at 443.99,15224.43 h125
  text "1. FABRICATE TO IPC-A-600, CURRENT REVISION" at 284.99,14924.43 h125
  text "2. BOARD SHALL MEET THE INSPECTION CRITERIA OF" at 283.99,14724.43 h125
  text "a- ACCEPTABILITY AS PER IPC-A-600 (LATEST REVISION) CLASS II" at 663.99,14524.43 h125
  text "b- QUALIFICATION AND PERFORMANCE AS PER IPC-6012 (LATEST REVISION)  CLASS II." at 532.99,14333.43 h125
  text "3. MATERIAL: Isola_370HR (RoHS COMPLIANT MATERIAL) OR EQUIVALENT. GLASS" at 283.99,14099.43 h125
  text "TRANSITION TEMPERATURE MUST MEET OR EXCEED THE TEMPERATURE EXHIBITED" at 650.99,13924.43 h125
  text "WITH HIGH TEMPERATURE PROCESSES ASSOCIATED WITH LEAD FREE ASSEMBLY." at 662.99,13749.43 h125
  text "4. APPLY SOLDER MASK OVER BARE COPPER (SMOBC) IAW" at 283.99,13524.43 h125
  text "IPC-SM-840, BOTH SIDES, USING LPI, COLOR BLUE." at 644.99,13324.43 h125
  text "5. LPI SOLDER  MASK  TAIYO PSR4000 (RoHS COMPLIANT MATERIAL)  OR EQUIVALENT WILL BE  USED ON BOTH" at 283.99,13049.43 h125
  text "SIDES." at 651.99,12849.43 h125
  text "6. SOLDER MASK REQUIREMENTS FOR VIAS:" at 283.99,12599.43 h125
  text "a) ALL VIAS SHOWN IN DATA WITH SOLDER MASK RELIEF OF 6 MILS OVER VIA DRILL SIZE FROM BOTTOM SIDE, SHALL HAVE" at 644.99,12340.43 h125
  text "SOLDER MASK ENCROACHED (DRILL PLUS 6 MILS)." at 1017.99,12165.43 h125
  text "b) ALL TENTED VIAS MUST BE PLUGED WITH SOLDERMASK." at 628.94,11870.27 h125
  text "7. SOLDER MASK REGISTRATION TO BE WITHIN DIAMETRICAL TRUE POSITION OF + / - 0.002\"WITH APPLICABLE" at 267.99,11408.43 h125
  text "HOLE / PAD." at 643.99,11233.43 h125
  text "8. FINISH: ENIG." at 267.99,11033.43 h125
  text "9. SILKSCREEN USING WHITE - HAVEN PC421 ( NON-CONDUCTIVE  OR EQUIVALENT  RoHS COMPLIANT MATERIAL)" at 267.99,10758.43 h125
  text "BOTH SIDES DISTORTION OF SILKSCREEN IS ACCEPTABLE  OVER TRACES.  EPOXY INK ON SOLDER LANDS IS" at 647.99,10583.43 h125
  text "NOT ACCEPTABLE." at 647.99,10408.43 h125
  text "10. VENDOR LOGO AND DATE CODE TO BE MARKED SOLDER  SIDE IN SILKSCREEN. MAXIMUM HEIGHT 0.12 INCHES." at 144.99,10183.43 h125
  text "11. 100% ELECTRICAL TEST REQUIRED FOR CONTINUITY. BOARD SHALL HAVE A" at 143.99,9983.43 h125
  text "UL-RATING OF 94V-0. UL SYMBOL AND RATING SHALL BE MARKED SOLDER SIDE IN SILKSCREEN." at 647.99,9808.43 h125
  text "12. REMOVE ALL UNUSED PADS FROM INTERNAL LAYERS." at 143.99,9583.43 h125
  text "13. 274X GERBER/ODB++ USED FOR FAB MUST BE VERIFIED AGAINST THE PROVIDED IPC356 NETLIST. COPPER" at 143.99,9333.43 h125
  text "SLIVERS THAT ARE LESS THAN 0.003\" IN WIDTH BETWEEN ANTI-PAD TO PLANE EDGE, ANTI-PAD TO SPLIT" at 640.99,9158.43 h125
  text "PLANE AND ANTI-PAD TO ANTI-PAD MUST BE REMOVED FROM THE MANUFACTURING ARTWORK. A NETLIST" at 644.99,8983.43 h125
  text "COMPARISON MUST BE PASSED WITH NO VIOLATION AFTER THE REMOVAL OF SLIVERS. ANY REQUIREMENT" at 651.99,8808.43 h125
  text "FOR SLIVER REMOVAL ABOVE OR EQUAL TO THE 0.003\" COPPER WIDTH MUST BE ADDRESSED AND APPROVED" at 643.99,8633.43 h125
  text "IN WRITING BY SUPPLIER." at 630.99,8458.43 h125
  text "14." at 164.94,8181.27 h125
  text "Finish:" at 603.94,8177.27 h125
  text "ENIG 3-8/180-220 microinches" at 1409.94,8172.27 h125
  text "15." at 173.53,7966.8 h125
  text "NSMD pads are used" at 595.53,7960.8 h125
Mechanical 101:
  drawing of 3330 lines, arcs and shapes, not listed
Mechanical 102:
  lines w0.5: 19475.17,28457.76 19473.46,28457.76 19475.17,28457.76 ; 19475.17,28457.76 19476.88,28457.76 19475.17,28457.76 ; 19475.17,28457.76 19475.17,28456.05 19475.17,28457.76 ; 19475.17,28457.76 19475.17,28459.48 19475.17,28457.76 ; 19475.17,28479.76 19475.17,28478.05 19475.17,28479.76 ; 19475.17,28479.76 19475.17,28481.48 19475.17,28479.76 ; 19475.17,28479.76 19473.46,28479.76 19475.17,28479.76 ; 19475.17,28479.76 19476.88,28479.76 19475.17,28479.76 ; 19478.17,28460.76 19477.01,28460.76 19478.17,28460.76 ; 19478.17,28460.76 19479.33,28460.76 19478.17,28460.76 ; 19478.17,28460.76 19478.17,28459.6 19478.17,28460.76 ; 19478.17,28460.76 19478.17,28461.93 19478.17,28460.76 ; 19486.17,28468.76 19470.79,28468.76 19486.17,28468.76 ; 19486.17,28468.76 19501.55,28468.76 19486.17,28468.76 ; 19486.17,28468.76 19486.17,28453.39 19486.17,28468.76 ; 19486.17,28468.76 19486.17,28484.14 19486.17,28468.76 ; 19494.17,28460.76 19493.01,28460.76 19494.17,28460.76 ; 19494.17,28460.76 19495.33,28460.76 19494.17,28460.76 ; 19494.17,28460.76 19494.17,28459.6 19494.17,28460.76 ; 19494.17,28460.76 19494.17,28461.93 19494.17,28460.76 ; 19494.17,28476.76 19493.01,28476.76 19494.17,28476.76 ; 19494.17,28476.76 19495.33,28476.76 19494.17,28476.76 ; 19494.17,28476.76 19494.17,28475.6 19494.17,28476.76 ; 19494.17,28476.76 19494.17,28477.93 19494.17,28476.76 ; 19497.17,28457.76 19495.46,28457.76 19497.17,28457.76 ; 19497.17,28457.76 19498.88,28457.76 19497.17,28457.76 ; 19497.17,28457.76 19497.17,28456.05 19497.17,28457.76 ; 19497.17,28457.76 19497.17,28459.48 19497.17,28457.76 ; 19497.17,28479.76 19495.46,28479.76 19497.17,28479.76 ; 19497.17,28479.76 19498.88,28479.76 19497.17,28479.76 ; 19497.17,28479.76 19497.17,28478.05 19497.17,28479.76 ; 19497.17,28479.76 19497.17,28481.48 19497.17,28479.76

## Dimensions
5199.58,2702 to 4999.58,2501.8 on Drill Drawing
4999.58,2501.8 to 5199.58,2702 on Drill Drawing
5199.58,0 to 4999.58,199.8 on Drill Drawing
0,0 to 200,200 on Drill Drawing
200,200 to 4999.58,199.8 on Drill Drawing
-0.42,-1.2 to 5199.58,0 on Drill Drawing
200,200 to 200,2500 on Drill Drawing
0,0 to -35,2700 on Drill Drawing

## Text inside footprints (layer, text, board x,y; h text height)
SW1: Mechanical 13 "*" at 690.08,1054.8 h50 r180
SW4: Mechanical 13 "*" at 1684.53,2168.28 h50
U10: Mechanical 13 "*" at 927.96,1361.02 h50 r270
U18: Mechanical 13 "*" at 3756,1150 h50 r180
U19: Mechanical 13 "*" at 2537.58,673.06 h50 r180